# Altium PCB mosv1.0.PcbDoc
Units mil, origin at the board's own origin, x right, y up, seen from the top; angles counter-clockwise.
Board outline 6000 x 4000 mil, 2 copper layers (Top Layer, Bottom Layer); 59 components, 38 nets, 166 pads, 305 vias.
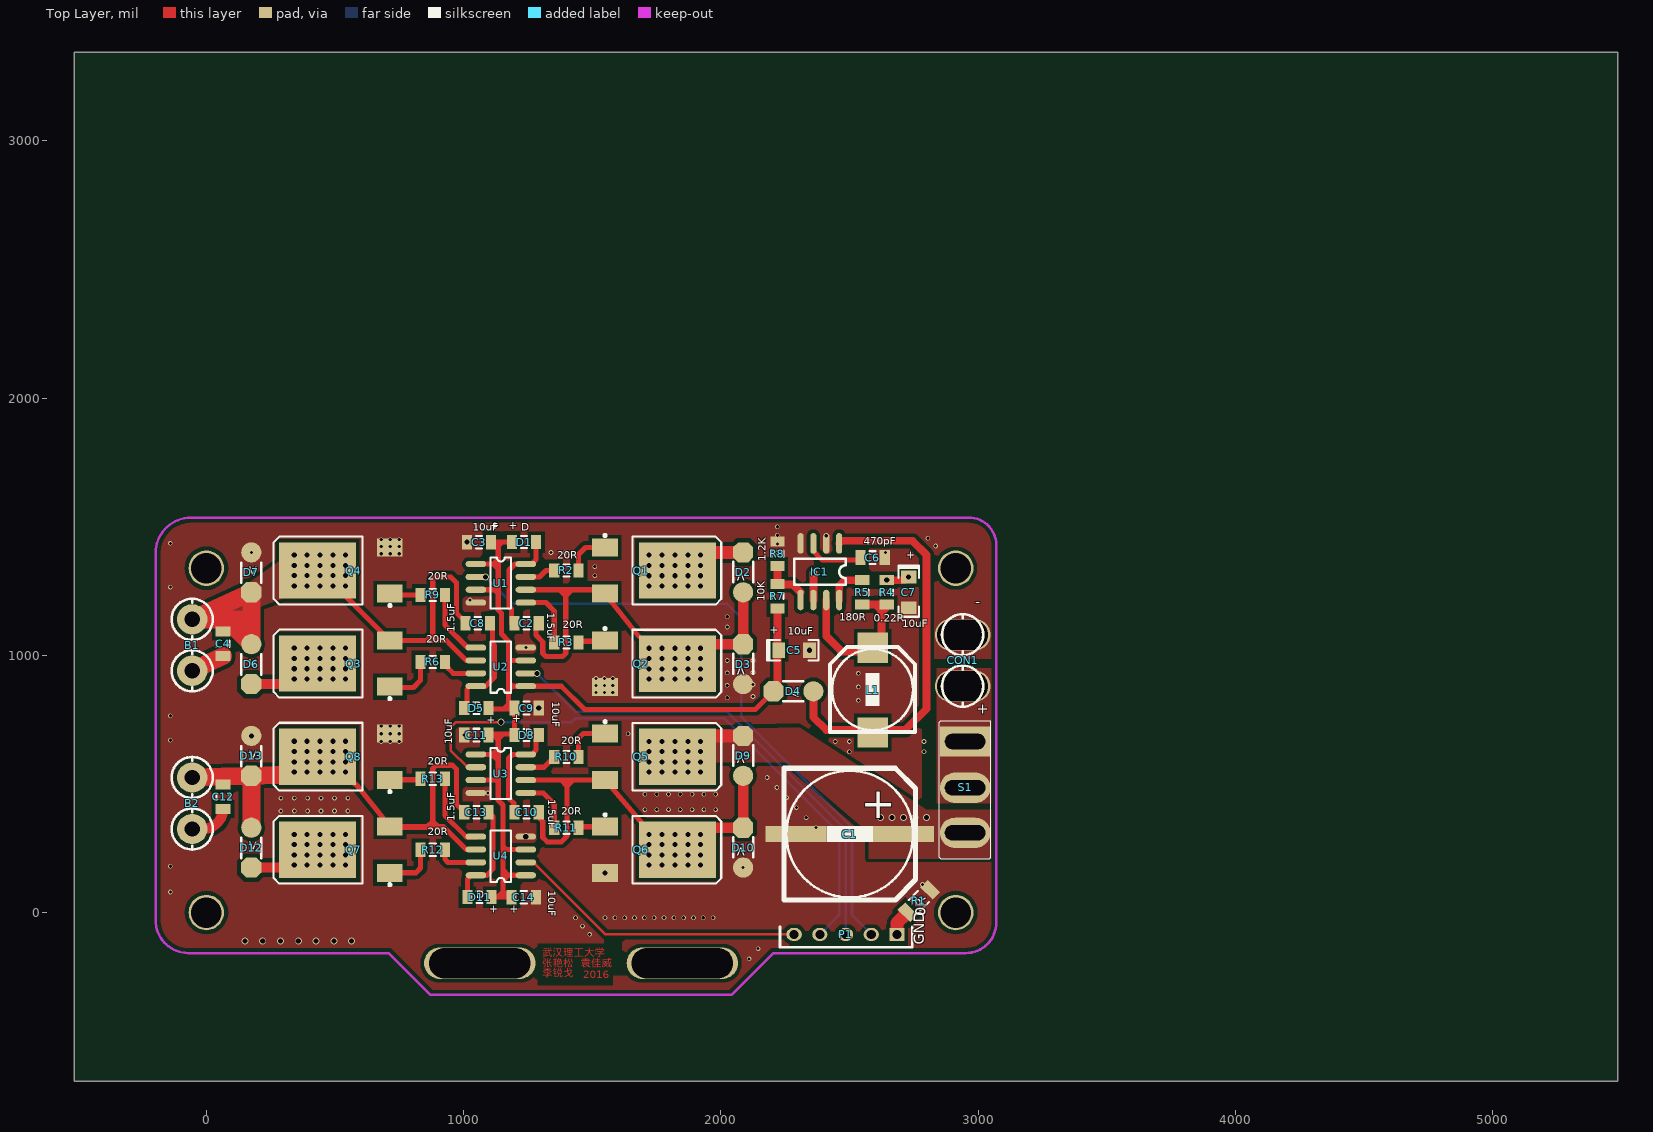
[diagram p0: Top Layer view]
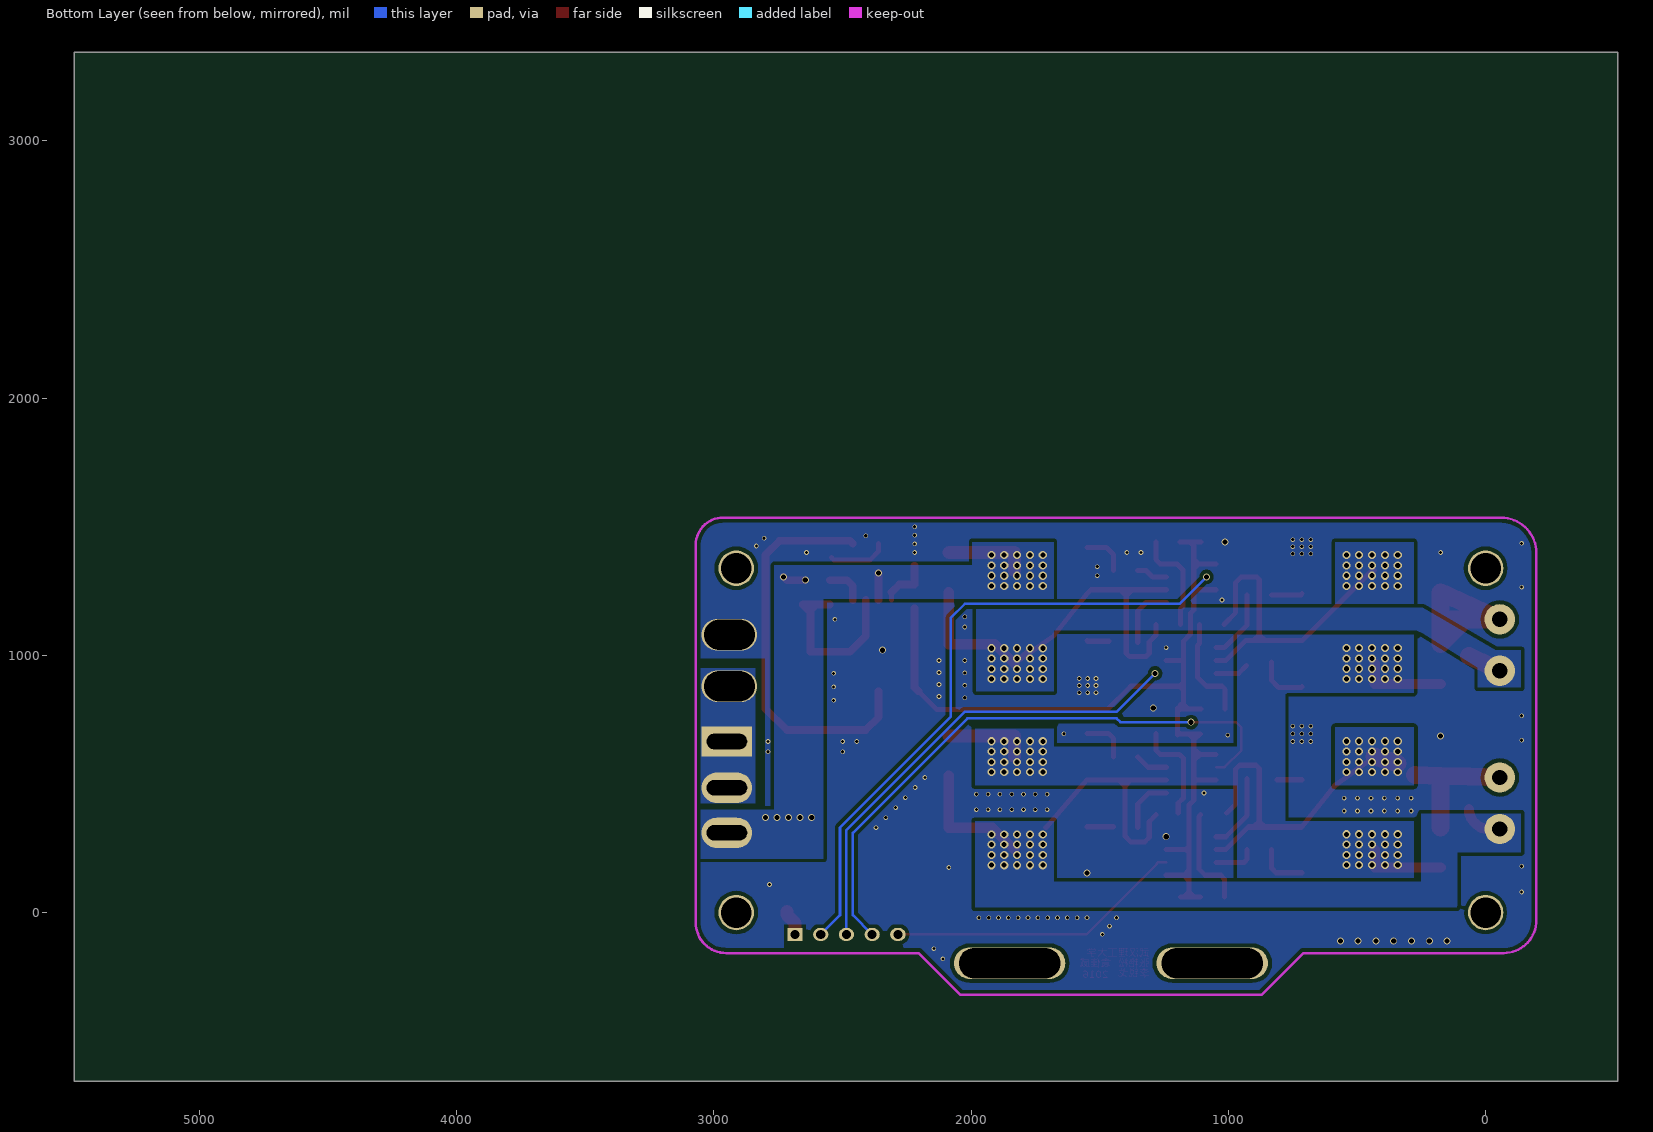
[diagram p1: Bottom Layer view, seen from below]

## Layer stack, top to bottom
Top Layer: signal copper 1.4
Dielectric: dielectric 12.6, FR-4, Dk 4.8
Bottom Layer: signal copper 1.4

## Board outline
-513.31,-655.71 5486.69,-655.71 5486.69,3344.29 -513.31,3344.29

## Design rules (kind name [scope] priority, off if disabled: settings)
Clearance [All] p1: gap=15
PlaneConnect [All] p1: planeconnectstyle=Direct reliefexpansion=20 reliefentries=4 reliefconductorwidth=10 reliefairgap=10
PolygonConnect [All] p1: connectstyle=Direct reliefconductorwidth=10 reliefentries=4 polygonreliefangle="90 Angle" airgapwidth=10
RoutingVias [All] p1: holewidth=28 width=50 viastyle="Through Hole" minholewidth=28 minwidth=50 maxholewidth=28 maxwidth=50
SolderMaskExpansion [All] p1: expansion=4
Width [All] p1: maxlimit=70 minlimit=10 preferedwidth=40 minimp=50.000000 maximp=50.000000 favimp=50.000000
27 further rules are at their usual default settings.

## Components (designator, comment, footprint, x,y, rotation, side; value= is the part's Value field where it differs from the comment)
B1 "Motor" KF301-2P#1 -55,1040 r0 top
B2 "Motor" KF301-2P#1 -55,425 r0 top
C1 "Cap" SMD-EC-F12.5 2710,305 r180 top
C2 "Cap" C2012 1245,1125 r180 top
C3 "Cap Pol1" C2012 1060,1440 r180 top
C4 "Cap" C2012 65,1045 r90 top
C5 "Cap Pol1" 1206C 2285,1020 r180 top
C6 "Cap" C2012 2590,1380 r180 top
C7 "Cap Pol1" 1206C 2730,1245 r90 top
C8 "Cap" C2012 1055,1125 r0 top
C9 "Cap Pol1" C2012 1245,795 r0 top
C10 "Cap" C2012 1245,390 r180 top
C11 "Cap Pol1" C2012 1050,690 r180 top
C12 "Cap" C2012 65,450 r90 top
C13 "Cap" C2012 1050,390 r0 top
C14 "Cap Pol1" C2012 1234.02,60 r0 top
CON1 "PowerIn" KF301-2P#2 2940,980 r180 top
D1 "S4" R2012 1235,1440 r0 top
D2 "SS14" "hole-chip diode" 2126.69,1245 r90 top
D3 "SS14" "hole-chip diode" 2126.69,888.33 r90 top
D4 "SS14" "hole-chip diode" 2360,900 r180 top
D5 "S4" R2012 1050,795 r180 top
D6 "SS14" "hole-chip diode" 135,1043.33 r270 top
D7 "SS14" "hole-chip diode" 135,1400 r270 top
D8 "S4" R2012 1245,690 r0 top
D9 "SS14" "hole-chip diode" 2126.69,531.67 r90 top
D10 "SS14" "hole-chip diode" 2126.69,175 r90 top
D11 "S4" R2012 1061.97,60 r180 top
D12 "SS14" "hole-chip diode" 135,330 r270 top
D13 "SS14" "hole-chip diode" 135,686.67 r270 top
IC1 "MC34063" SO-8 2460,1435 r270 top
L1 "Inductor" SMD-EC-F8 2590,1005 r270 top
P1 "Header 5" 2.54XD_5 2485,-85 r180 top
Q1 "IR7843" LR7843 1691.69,1329.29 r180 top
Q2 "IR7843" LR7843 1691.69,967.56 r180 top
Q3 "IR7843" LR7843 571.69,967.76 r0 top
Q4 "IR7843" LR7843 571.69,1329.49 r0 top
Q5 "IR7843" LR7843 1691.69,605.83 r180 top
Q6 "IR7843" LR7843 1691.69,244.09 r180 top
Q7 "IR7843" LR7843 571.69,244.29 r0 top
Q8 "IR7843" LR7843 571.69,606.02 r0 top
R1 "Res2" 1206(2) 2770,45 r225 top
R2 "Res2" R2012 1400,1330 r0 top
R3 "Res2" R2012 1400,1050 r0 top
R4 "Res2" R2012 2645,1245 r270 top
R5 "Res2" R2012 2550,1245 r270 top
R6 "Res2" R2012 880,974.29 r180 top
R7 "Res2" R2012 2220,1230 r90 top
R8 "Res2" R2012 2220,1395 r270 top
R9 "Res2" R2012 880,1235 r180 top
R10 "Res2" R2012 1400,605 r0 top
R11 "Res2" R2012 1400,330 r0 top
R12 "Res2" R2012 880,244.29 r180 top
R13 "Res2" R2012 880,520 r180 top
S1 "SW-SPST" SW-125V6A(-) 2950,665 r270 top
U1 "IR2104S" IR2104 1145,1280 r0 top
U2 "IR2104S" IR2104 1145,955 r180 top
U3 "IR2104S" IR2104 1145,540 r0 top
U4 "IR2104S" IR2104 1145,220 r180 top

## Footprints (in the part's own frame and the unit in brackets; to place one, negate y for a bottom-side part, rotate by r counter-clockwise, add the part's x,y. Pads: shape width x height; smd on the part's side, far side on the other; paste and mask are expansions set on the pad)
2.54XD_5 [mm]
  rect 1.5x1.27 hole 0.9: 1(-5.08,0)
  oval 1.5x1.27 hole 0.9: 2(-2.54,0) 3(0,0) 4(2.54,0)
  oval 1.524x1.27 hole 0.9: 5(5.08,0)
  silkscreen extent -6.6,-0.76 6.48,1.27
1206(2) [mm]
  rect 1.05x1.75 smd: 1(-1.575,0) 2(1.575,0)
  silkscreen extent -0.65,-0.77 0.65,0.77, body extent -1.6,-0.8 1.6,0.8, height 1.6
1206C [mil]
  rect 50x60 smd: 1(60,0) 2(-60,0)
  silkscreen extent -95,-40 105,40
C2012 [mm] "Chip Capacitor, 2-Leads, Body 2.0x1.2mm, IPC Low Density"
  rect 1x1.45 smd: 1(-1.2,0) 2(1.2,0)
  silkscreen extent -0.3,-0.63 0.3,0.63, body extent -0.98,-0.6 1.02,0.6, height 0.5
"hole-chip diode" [mm]
  round 2 smd: 1(0,1.016)
  oct 2x2 smd: 2(3.937,1.016)
  silkscreen extent 1,0 3,2
IR2104 [mil]
  oval 80x23.62 smd: 1(-97,75) 2(-97,25) 3(-97,-25) 4(-97,-75) 5(97,-75) 6(97,-25) 7(97,25) 8(97,75)
  silkscreen extent -40,-98 40,100
KF301-2P#1 [mm]
  round 3 hole 1.5: 1(0,-2.54) 2(0,2.54)
  silkscreen extent -2.03,-4.57 2.03,4.57
KF301-2P#2 [mm]
  oval 5.5x3.1 hole 3 slot 5 at 0 deg: 1(0,-2.54) 2(0,2.54)
  silkscreen extent -2.03,-4.57 2.03,4.57
LR7843 [mm]
  rect 2.54x1.778 smd: 1(3.6,-2.28) 3(3.6,2.28)
  rect 7.6x5.55 smd: 2(-3.556,0)
  silkscreen extent -7.87,-3.58 3.72,3.35
R2012 [mm] "Chip Resistor, 2-Leads, Body 2.0x1.2mm, IPC Low Density"
  rect 1x1.4 smd: 1(-1.2,0) 2(1.2,0)
  silkscreen extent -0.3,-0.6 0.3,0.6, body extent -0.98,-0.6 1.02,0.6, height 0.5
SMD-EC-F8 [mm]
  rect 3x3 smd: 1(-0.635,0) 2(7.747,0)
  silkscreen extent -0.69,-4.22 7.71,4.2
SMD-EC-F12.5 [mm]
  rect 6x1.6 smd: 1(0,0) 2(10.625,0)
  silkscreen extent -1.2,-6.5 11.8,6.49
SO-8 [mil]
  oval 80x24 smd: 1(0,0) 2(0,-50) 3(0,-100) 4(0,-150) 5(220,-150) 6(220,-100) 7(220,-50) 8(220,0)
  silkscreen extent 60,-175 160,25
SW-125V6A(-) [mm]
  rect 3x5 hole 1.5 slot 4 at 90 deg: 0(0,0)
  oval 3x5 hole 1.5 slot 4 at 90 deg: 1(4.572,0) 2(9.017,0)
  silkscreen extent -2.03,-2.54 11.56,2.54

## Part data
B1 B2: library part "Motor Servo", "Servo Motor"
C1: library part CAP+
C2 C4 C6 C8 C10 C12 C13: "Capacitor"
C3 C5 C7 C9 C11 C14: "Polarized Capacitor (Radial)"
CON1: library part "Header 2", "Header, 2-Pin"
D1 D2 D3 D4 D5 D6 D7 D8 D9 D10 D11 D12 D13: library part "Diode 1N4007", "1 Amp General Purpose Rectifier"
P1: "Header, 5-Pin"
Q1 Q2 Q3 Q4 Q5 Q6 Q7 Q8: library part NMOS-2, "N-Channel Power MOSFET"
R1 R2 R3 R4 R5 R6 R7 R8 R9 R10 R11 R12 R13: "Resistor"
S1: "Single-Pole, Single-Throw Switch"
U1 U2 U3 U4: library part Component_1_1

## Free pads (board coordinates)
  round 137.8 hole 118.11: 0(0,0) 0(0,1338.58) 0(2913.39,0) 0(2913.39,1338.58)
  oval 433.07x122.05 hole 118.11 slot 393.7 at 0 deg: 0(1062.99,-196.85) 0(1850.39,-196.85)

## Via types
v1: diameter 31.5, hole 19.68, Top Layer to Bottom Layer, 160 vias
v2: diameter 18, hole 12, Top Layer to Bottom Layer, 121 vias
v3: diameter 27, hole 20, Top Layer to Bottom Layer, 24 vias

## Nets (pads, with @x,y where several pads share a name; then routed paths per layer and width w, separated by ;. In a path a pad name is that pad's centre, name@x,y a point inside that pad or via, vN(x,y) a via of type N, cw(c..) or ccw(c..) an arc to the next point about the centre after c; other vN are vias at no path point)
12V: C3.1 C5.1 C9.1 C11.1 C14.1 D1.1 D4.2 D5.1 D8.1 D11.1 R7.1 U1.1 U1.3 U2.1 U2.3 U3.1 U3.3 U4.1 U4.3 | length 4205.8
  Top Layer w20: U3.3 1125,515 ; U3.1 1110,615 ; U1.3 1120,1255 ; U1.1 1115,1355 ; D5.1@1107.24,790.98 1155.98,790.98 ; C3.1 1127.5,1440 ; C11.1@1108.23,694.02 1145,694.02 ; D11.1 1133.07,60 ; C11.1@1110.98,694.02 1132.5,672.5 1154.02,694.02 ; 1127.5,1355 1115,1355 ; 1135,1240 1120,1255 ; 1153.07,61.93 1153.07,80 ; 1162.99,145 1173.07,145 ; 1175,795 1175,810 ; 1175,980 U2.3 ; C14.1 C14.1@1173.07,60 ; C9.1@1186.77,790 C9.1@1186.77,790.98 ; C9.1@1186.77,808.23 C9.1@1186.77,790.98 ; D8.1@1187.76,695 1186.77,694.02 1154.02,694.02 ; D1.1 1150,1440 ; D8.1 C9.1 ; U4.1 1173.07,145 ; U4.3 1165,245 ; D4.2 2135,790 1470,790 1380,880 U2.1 1190,880 ; 1110,615 1135,590 ; 1110,615 1135,615 ; 1110,615 1135,635 ; 1115,1355 1135,1375 ; 1115,1355 1135,1335 ; 1120,1255 1135,1270 ; 1125,515 1135,525 ; 1125,515 1135,505 ; 1127.5,1440 1135,1432.5 1135,1425 ; 1127.5,1440 1150,1440 ; 1133.07,60 1153.07,80 ; 1133.07,60 C14.1@1173.07,60 ; 1135,505 1135,435.83 1153.07,417.76 1153.07,256.93 ; 1135,505 1135,525 ; 1135,525 1135,590 ; 1135,590 1135,615 ; 1135,615 1135,635 ; 1135,635 1135,684.02 1145,694.02 ; 1135,1270 1135,1335 ; 1135,1270 1135,1175.83 1147.24,1163.58 1147.24,1082.76 1175,1055 1175,895 ; 1135,1335 1135,1375 ; 1135,1375 1135,1425 ; 1135,1425 1150,1440 ; 1145,694.02 1154.02,694.02 ; 1153.07,80 C14.1@1173.07,60 ; 1153.07,80 1153.07,125 ; 1153.07,125 1173.07,145 ; 1153.07,125 1153.07,165 ; 1153.07,165 1173.07,145 ; 1153.07,165 1153.07,233.07 ; 1153.07,233.07 1165,245 ; 1153.07,233.07 1153.07,256.93 ; 1153.07,256.93 1165,245 ; 1155.98,790.98 1175,810 ; 1155.98,790.98 C9.1@1186.77,790.98 ; 1175,810 1175,865 ; 1175,865 1190,880 ; 1175,865 1175,880 ; 1175,880 1175,895 ; 1175,880 1190,880 ; 1175,895 1190,880
  Top Layer w30: D4.2 2220,875 R7.1
GND: C1.2 C3.2 C5.2 C6.1 C7.2 C9.2 C11.2 C14.2 CON1.1 D3.1 D7.1 D10.1 D13.1 IC1.2 IC1.4 Q2.3 Q4.3 Q6.3 Q8.3 R1.1 R8.1 U1.4 U2.4 U3.4 U4.4
  other v2: 2110,-180 2145,-140 1490,-85 1462.5,-52.5 1435,-20 1550,-20 1588.18,-20 1626.36,-20 1664.55,-20 1702.73,-20 1740.91,-20 1779.09,-20 1817.27,-20 1855.45,-20 1893.64,-20 1931.82,-20 1970,-20 -140,80 2783.85,108.85 2086.69,175 -140,180 2370,330 2332,369 290,395 342,395 394,395 446,395 498,395 550,395 1705,400 1750.83,400 1796.67,400 1842.5,400 1888.33,400 1934.17,400 1980,400 2294,408 290,445 342,445 394,445 446,445 498,445 550,445 2256,447 1705,460 1750.83,460 1796.67,460 1842.5,460 1888.33,460 1934.17,460 1980,460 1095,465 2218,486 2180,525 2500,625 2790,625 680,665 715,665 750,665 2445,665 2500,665 2790,665 -140,670 1002.76,690 680,695 715,695 750,695 1640,695 680,725 715,725 750,725 -140,765 2535,825 2025,835 2125,840 1515,855 1547.5,855 1580,855 2535,877.5 1515,882.5 1547.5,882.5 1580,882.5 2025,883.33 2125,886.67 1515,910 1547.5,910 1580,910 2535,930 2025,931.67 2125,933.33 2025,980 2125,980 1242,1030 2025,1110 2530,1140 2025,1150 1025,1215 -140,1265 1510,1310 1510,1345 680,1395 715,1395 750,1395 175,1400 1340,1400 1395,1400 2220,1400 2640,1400 680,1422.5 715,1422.5 750,1422.5 2835,1425 2220,1433.33 -140,1435 680,1450 715,1450 750,1450 2805,1455 2410,1465 2220,1466.67 2220,1500
  other v3: 150,-110 219.17,-110 288.33,-110 357.5,-110 426.67,-110 495.83,-110 565,-110 1549.96,154.33 1242,295 175,686.67 1292.24,795 2345,1020 1012.76,1440
NetB1_1: B1.1 C2.1 C4.1 D2.1 D3.2 Q1.3 Q2.2 U1.6 | length 1960.5
  Top Layer w20: U1.6 1372.44,1255 ; C2.1@1281.26,1120 1281.26,1078.74 1308.07,1051.93 1308.07,1006.93 1320,995 1385,995 1397.44,1007.44 1397.44,1230 ; 1425,1255 1422.44,1255 ; Q2.2@1770.65,1026.48 1816.52,982.2 Q2.2 1815.6,978.96 1782.3,1002.54 1763.44,1015.9 1730.14,1039.49 1680,1075 Q1.3 1534.49,1255 1422.44,1255 ; 1372.44,1255 1397.44,1230 ; 1372.44,1255 1397.44,1255 ; 1397.44,1230 1422.44,1255 ; 1397.44,1230 1397.44,1255 ; 1397.44,1255 1422.44,1255
  Top Layer w40: Q2.2 1907.47,1043.33 D3.2 D2.1
  Top Layer w70: B1.1 C4.1
  other v1: 1721.69,907.56 1771.69,907.56 1821.69,907.56 1871.69,907.56 1921.69,907.56 1721.69,947.56 1771.69,947.56 1821.69,947.56 1871.69,947.56 1921.69,947.56 1721.69,987.56 1771.69,987.56 1821.69,987.56 1871.69,987.56 1921.69,987.56 1721.69,1027.56 1771.69,1027.56 1821.69,1027.56 1871.69,1027.56 1921.69,1027.56
NetB1_2: B1.2 C4.2 C8.1 D6.1 D7.2 Q3.3 Q4.2 U2.6 | length 2232.1
  Top Layer w20: Q4.2 441.46,1329.49 Q3.3 857.52,1057.52 ; 905,1057.52 902.48,1057.52 ; C8.1@1017.76,1120 971.93,1165.83 971.93,1283.07 950,1305 890,1305 880,1295 880,1080 ; U2.6 1010,980 932.48,1057.52 902.48,1057.52 ; 857.52,1057.52 880,1080 ; 857.52,1057.52 880,1057.52 ; 880,1057.52 902.48,1057.52 ; 880,1057.52 880,1080 ; 880,1080 902.48,1057.52
  Top Layer w70: 175,1140 B1.2 D7.2 175,1140 ; 175,1140 95,1125 96.68,1123.28 D6.1 175,1140
  other v1: 341.69,1269.49 391.69,1269.49 441.69,1269.49 491.69,1269.49 541.69,1269.49 341.69,1309.49 391.69,1309.49 441.69,1309.49 491.69,1309.49 541.69,1309.49 341.69,1349.49 391.69,1349.49 441.69,1349.49 491.69,1349.49 541.69,1349.49 341.69,1389.49 391.69,1389.49 441.69,1389.49 491.69,1389.49 541.69,1389.49
NetB2_1: B2.1 C10.1 C12.1 D9.1 D10.2 Q5.3 Q6.2 U3.6 | length 1700
  Top Layer w20: U3.6 1380,515 ; C10.1@1281.26,380 1308.07,353.19 1308.07,292.09 1325.16,275 1380.36,275 1402.56,297.2 1402.56,492.56 ; Q5.3@1548.9,515 1425,515 ; Q5.3@1550.03,515.98 Q6.2@1710,330 ; 1380,515 1402.44,492.56 1402.56,492.56 ; 1380,515 1402.56,515 ; 1402.56,492.56 1425,515 ; 1402.56,492.56 1402.56,515 ; 1402.56,515 1425,515
  Top Layer w40: B2.1 -12.76,325 ccw(c-12.76,402.76) C12.1 ; Q6.2 1917.6,330 D10.2 D9.1
  other v1: 1721.69,184.09 1771.69,184.09 1821.69,184.09 1871.69,184.09 1921.69,184.09 1721.69,224.09 1771.69,224.09 1821.69,224.09 1871.69,224.09 1921.69,224.09 1721.69,264.09 1771.69,264.09 1821.69,264.09 1871.69,264.09 1921.69,264.09 1721.69,304.09 1771.69,304.09 1821.69,304.09 1871.69,304.09 1921.69,304.09
NetB2_2: B2.2 C12.2 C13.1 D12.1 D13.2 Q7.3 Q8.2 U4.6 | length 2202.3
  Top Layer w20: Q8.2 447.75,594.39 480.55,570.64 499.55,556.88 532.35,533.13 585,495 Q7.3 ; 925,330 905,330 ; C13.1@1006.87,386.87 971.93,421.81 971.93,557.91 957.28,572.56 892.44,572.56 892.5,572.5 880,560 880,355 ; U4.6 1010,245 920.94,334.06 900.94,334.06 ; Q7.3 717.48,330 860,330 ; Q7.3 860,334.06 ; 860,330 860,334.06 ; 860,330 880,330 ; 860,334.06 860,335 880,355 ; 860,334.06 880,334.06 ; 880,330 880,334.06 ; 880,330 905,330 ; 880,334.06 900.94,334.06 ; 880,334.06 880,355 ; 880,355 900.94,334.06 ; 900.94,334.06 905,330
  Top Layer w70: B2.2 64.1,528.45 D13.2 ; D12.1 D13.2 ; 275,535 D13.2 ; Q8.2 400.13,596.88 389.44,593.79 382.34,591.73 378.75,590.69 371.85,588.69 Q8.2@354.01,583.52 ; Q8.2@354.01,583.52 343.32,580.42 Q8.2@354.01,583.52
  other v1: 341.69,546.02 391.69,546.02 441.69,546.02 491.69,546.02 541.69,546.02 341.69,586.02 391.69,586.02 441.69,586.02 491.69,586.02 541.69,586.02 341.69,626.02 391.69,626.02 441.69,626.02 491.69,626.02 541.69,626.02 341.69,666.02 391.69,666.02 441.69,666.02 491.69,666.02 541.69,666.02
NetC2_2: C2.2 D1.2 U1.8 | length 405.7
  Top Layer w20: C2.2@1186.77,1120 1186.77,1179.98 1177,1189.75 1177,1332 1200,1355 U1.8 1265,1355 1282.24,1372.24 D1.2
NetC6_2: C6.2 IC1.3 | length 231.6
  Top Layer w20: IC1.3 2360,1404.67 2394.67,1370 2532.76,1370 C6.2
NetC8_2: C8.2 D5.2 U2.8 | length 411.8
  Top Layer w20: D5.2@1012.76,790.98 1012.76,867.76 1025,880 U2.8 1085,880 1120,915 1120,1038.25 1112.24,1046 C8.2@1112.24,1120
NetC10_2: C10.2 D8.2 U3.8 | length 403.4
  Top Layer w20: C10.2@1195,388.23 1195,425.33 1175,445.33 1175,600 1190,615 U3.8 1265,615 1282.24,632.24 D8.2@1282.24,695
NetC13_2: C13.2 D11.2 U4.8 | length 399.5
  Top Layer w20: D11.2 1014.72,129.72 1030,145 U4.8 1090,145 1115,170 1115,373.23 C13.2@1108.23,380
NetD4_1: D4.1 IC1.1 L1.2 | length 1564.6
  Top Layer w20: D4.1 D4.1@2363.74,856.26
  Top Layer w30: D4.1 2360,760 2410,710 2717.48,710 2800,792.52 2800,1390 2745,1445 2470,1445 IC1.1
NetIC1_5: IC1.5 R7.2 R8.2 | length 205.2
  Top Layer w20: R7.2@2220,1275 R7.2 ; IC1.5 IC1.5@2310,1245
  Top Layer w30: R7.2@2220,1275 2280,1275 IC1.5@2310,1245 ; R7.2 R8.2
NetIC1_7: IC1.7 L1.1 R4.2 R5.2 | length 744
  Top Layer w30: IC1.7 2410,1075 2471.26,1013.74 2625,1013.74 R4.2@2625,1197.76 ; R5.2 2602.24,1197.76 ; 2602.24,1197.76 2628.62,1171.38 2655,1197.76 R4.2@2625,1197.76 ; 2602.24,1197.76 R4.2@2625,1197.76
NetIC1_8: IC1.8 R5.1 | length 154.2
  Top Layer w30: IC1.8 2460,1270 2482.24,1292.24 R5.1
NetP1_1: P1.1 R1.2 | length 102.4
  Top Layer w50: P1.1 2685,-40 2716.69,-8.31 R1.2@2716.69,4.29
NetQ1_1: Q1.1 R2.2 | length 176.1
  Top Layer w20: R2.2 1447.24,1392.24 1474.06,1419.06 Q1.1
NetQ2_1: Q2.1 R3.2 | length 85.9
  Top Layer w20: R3.2@1465,1055 1547.64,1055 Q2.1
NetQ3_1: Q3.1 R6.2 | length 203.6
  Top Layer w20: Q3.1 716.42,875 805,875 832.76,902.76 R6.2
NetQ4_1: Q4.1 R9.2 | length 121.3
  Top Layer w20: Q4.1 718.15,1235 R9.2
NetQ5_1: Q5.1 R10.2 | length 182.6
  Top Layer w20: R10.2 1447.24,677.24 1465.59,695.59 Q5.1
NetQ6_1: Q6.1 R11.2 | length 102.7
  Top Layer w20: R11.2@1447.24,333.86 Q6.1
NetQ7_1: Q7.1 R12.2 | length 198.4
  Top Layer w20: Q7.1 814.53,154.53 832.76,172.76 R12.2
NetQ8_1: Q8.1 R13.2 | length 97.8
  Top Layer w20: Q8.1 811.26,516.26
NetR2_1: R2.1 U1.7 | length 121.1
  Top Layer w20: U1.7 1295,1305 1320,1330 R2.1
NetR3_1: R3.1 U1.5 | length 246.6
  Top Layer w20: U1.5 1320,1205 1352.76,1172.24 R3.1
NetR6_1: R6.1 U2.7 | length 130.4
  Top Layer w20: R6.1@930,960 960,930 U2.7
NetR9_1: R9.1 U2.5 | length 274.3
  Top Layer w20: R9.1 927.24,1117.76 1015,1030 U2.5
NetR10_1: R10.1 U3.7 | length 127.3
  Top Layer w20: U3.7 1312.76,565 R10.1
NetR11_1: R11.1 U3.5 | length 220.7
  Top Layer w20: U3.5 1310,465 1352.76,422.24 R11.1
NetR12_1: R12.1 U4.7 | length 162.6
  Top Layer w20: R12.1 927.24,207.76 940,195 U4.7
NetR13_1: R13.1 U4.5 | length 297.3
  Top Layer w20: R13.1 927.24,377.76 1010,295 U4.5
PWM1: P1.2 U1.2 | length 2511.6
  Bottom Layer w10: v3(1085,1305) 1190,1200 2025,1200 2080,1145 2080,760.71 ; 2087.86,752.86 2080,760.71 ; P1.2 2510,-10 2510,330.71 2080,760.71
PWM2: P1.3 U2.2 | length 1857.9
  Bottom Layer w10: v3(1285,930) 1435,780 2025.36,780 2485,320.36 P1.3
PWM3: P1.4 U3.2 | length 2349.8
  Top Layer w10: U3.2 1015,565 950,630 950,720 970,740 v3(1145,740)
  Bottom Layer w10: v3(1145,740) 1420,740 1435,755 2015,755 2460,310 2460,-10 P1.4
PWM4: P1.5 U4.2 | length 1160.4
  Top Layer w10: U4.2 1275,195 1278.07,191.93 1278.07,189.5 1552.57,-85 P1.5
VBAT: CON1.2 S1.0 S1.1
VCC: C1.1 C7.1 D2.2 D6.2 D9.2 D12.2 IC1.6 Q1.2 Q3.2 Q5.2 Q7.2 R4.1 S1.2 | length 1518.9
  Top Layer w30: IC1.6 v3(2360,1320) ; v3(2645,1292.24) 2717.24,1292.24 v3(2730,1305)
  Top Layer w40: D12.2 431.69,175 Q7.2 ; D6.2 431.69,888.33 Q3.2
  Top Layer w50: Q5.2 1831.69,686.67 D9.2 ; Q1.2 1831.69,1400 D2.2
  other v1: 341.69,184.29 391.69,184.29 441.69,184.29 491.69,184.29 541.69,184.29 341.69,224.29 391.69,224.29 441.69,224.29 491.69,224.29 541.69,224.29 341.69,264.29 391.69,264.29 441.69,264.29 491.69,264.29 541.69,264.29 341.69,304.29 391.69,304.29 441.69,304.29 491.69,304.29 541.69,304.29 1721.69,545.83 1771.69,545.83 1821.69,545.83 1871.69,545.83 1921.69,545.83 1721.69,585.83 1771.69,585.83 1821.69,585.83 1871.69,585.83 1921.69,585.83 1721.69,625.83 1771.69,625.83 1821.69,625.83 1871.69,625.83 1921.69,625.83 1721.69,665.83 1771.69,665.83 1821.69,665.83 1871.69,665.83 1921.69,665.83 341.69,907.76 391.69,907.76 441.69,907.76 491.69,907.76 541.69,907.76 341.69,947.76 391.69,947.76 441.69,947.76 491.69,947.76 541.69,947.76 341.69,987.76 391.69,987.76 441.69,987.76 491.69,987.76 541.69,987.76 341.69,1027.76 391.69,1027.76 441.69,1027.76 491.69,1027.76 541.69,1027.76 1721.69,1269.29 1771.69,1269.29 1821.69,1269.29 1871.69,1269.29 1921.69,1269.29 1721.69,1309.29 1771.69,1309.29 1821.69,1309.29 1871.69,1309.29 1921.69,1309.29 1721.69,1349.29 1771.69,1349.29 1821.69,1349.29 1871.69,1349.29 1921.69,1349.29 1721.69,1389.29 1771.69,1389.29 1821.69,1389.29 1871.69,1389.29 1921.69,1389.29
  other v3: 2620,370 2665,370 2710,370 2755,370 2800,370

## Polygon pours and split planes (outlines as drawn)
GND on Top Layer "Keep-Out Layer-No Net" (solid, remove dead copper, pour order 81): 3069.99,987.66 3069.99,1535 2903.07,1535 -195,1535 -195,1151.03 -195,-355 1087.21,-355 3070.87,-355 3070.87,206.57 2781.68,206.57 2781.68,987.66
VCC on Top Layer "Keep-Out Layer-No Net" (solid, pour order 43): 2215,620 2575,310 2800,400 2305,720
VCC on Top Layer "Keep-Out Layer-No Net" (solid, pour order 39): 1980,713.25 1980,585 2305,585 2305,720
VBAT on Top Layer "Keep-Out Layer-No Net" (solid, remove dead copper, pour order 15): 2840,950 3070.87,950 3070.87,425 2850,425 2840,425 2840,950
VCC on Top Layer "Keep-Out Layer-No Net" (solid, remove dead copper, pour order 17): 3070.87,400 2575,400 2575,210 3070,210
NetB1_2 on Top Layer "Keep-Out Layer-No Net" (solid, remove dead copper, pour order 22): 85,1145 350,1240 330,1400 50,1200
VCC on Bottom Layer "Keep-Out Layer-No Net" (solid, remove dead copper, pour order 93): 1970,1350 2765,1350 2765,390 2765,365 2575,365 2575,1220 1965,1220
VCC on Bottom Layer "Keep-Out Layer-No Net" (solid, remove dead copper, pour order 91): 1755,495 875,495 875,645 1725,645
VCC on Bottom Layer "Keep-Out Layer-No Net" (solid, remove dead copper, pour order 89): 570,1080 965,1080 965,585 965,135 555,135 540,135 540,355 585,355 780,355 780,820 780,850 545,850
GND on Bottom Layer "Keep-Out Layer-No Net" (solid, remove dead copper, pour order 87): 3070.87,988.74 3070.87,1535.43 2517.81,1535.43 -200,1535.43 -200,758.82 -200,-355 992.99,-355 3070.87,-355 3070.87,150.82 3070.87,212.13 2831.89,212.13 2801.5,212.13 2801.5,564.67 2801.5,988.74 2887.62,988.74
GND on Bottom Layer "Keep-Out Layer-No Net" (solid, pour order 75): 3070,210 3070,-157.48 2204.72,-157.48 2575,-157.48 2575,210
NetB2_1 on Bottom Layer "Keep-Out Layer-No Net" (solid, pour order 67): 125,385 250,385 250,24.93 250,20 110,20 110,385
NetB2_1 on Bottom Layer "Keep-Out Layer-No Net" (solid, pour order 65): 1680,200 1680,120 245,120 200,120 200,30 200,20 1900,20 1985,20 1985,200
NetB2_1 on Bottom Layer "Keep-Out Layer-No Net" (solid, pour order 63): -157.48,385 125,385 125,245 125,235 -157.48,235
NetB1_1 on Bottom Layer "Keep-Out Layer-No Net" (solid, pour order 59): 245,1184.71 -100,985 -55,900 245,1085.85 365,1140
NetB1_1 on Bottom Layer "Keep-Out Layer-No Net" (solid, pour order 55): 245,1185 1980,1185 1980,1092.12 1980,1070 1680,1070 1680,1096.54 245,1096.54
NetB2_1 on Bottom Layer "Keep-Out Layer-No Net" (solid, pour order 53): 1815,355 1985,355 1985,270 1985,135 1790,135 1680,135 1680,285 1680,355 1755,355
NetB1_1 on Bottom Layer "Keep-Out Layer-No Net" (solid, pour order 51): 1785,1080 1980,1080 1980,935 1980,860 1785,860 1680,860 1680,1030 1680,1080 1730,1080
NetB2_2 on Bottom Layer "Keep-Out Layer-No Net" (solid, pour order 49): 380,720 585,720 585,585 585,495 385,495 280,495 280,650 280,720 345,720
NetB1_2 on Bottom Layer "Keep-Out Layer-No Net" (solid, pour order 47): 280,1440 585,1440 585,1200 420,1200 280,1200 280,1390
NetB1_1 on Bottom Layer "Keep-Out Layer-No Net" (solid, pour order 45): -157.48,875 30,875 30,1010 30,1020 -157.48,1020
VCC on Bottom Layer "Keep-Out Layer-No Net" (solid, pour order 31): 1680,1440 1995,1440 1995,1220 1680,1220
VBAT on Bottom Layer "Keep-Out Layer-No Net" (solid, remove dead copper, pour order 16): 2840,950 3070.87,950 3070.87,425 2840,425
VCC on Bottom Layer "Keep-Out Layer-No Net" (solid, remove dead copper, pour order 18): 3070,210 2575,210 2575,400 3070,400
VCC on Bottom Layer "Keep-Out Layer-No Net" (solid, remove dead copper, pour order 23): 280,355 585,355 585,205 585,135 280,135
VCC on Bottom Layer "Keep-Out Layer-No Net" (solid, remove dead copper, pour order 24): 1680,715 1680,495 1960,495 1985,495 1985,625 1985,715 1955,715
VCC on Bottom Layer "Keep-Out Layer-No Net" (solid, remove dead copper, pour order 26): 280,1080 280,855 485,855 580,855 580,965 580,1080 480,1080

## Keep-outs
Keep-Out Layer:
  lines w9.65: -196.85,-30 ccw(c-69.85,-30.48) -70.32,-157.48 ; -196.85,1397.4 cw(c-59.64,1398.23) -60.47,1535.43 ; 2963.49,1535.43 cw(c2964.46,1429.03) 3070.87,1430
  lines w10: -196.85,-30 -196.85,1397.4 ; -70.32,-157.48 708.66,-157.48 871.18,-320 2042.2,-320 2204.72,-157.48 2952.76,-157.48 ccw(c2952.76,-39.37) 3070.87,-39.37 3070.87,1430 ; -60.47,1535.43 2204.72,1535.43 2963.49,1535.43

## Other copper
Top Layer:
  text "武汉理工大学" at 1305,-180 h50
  text "张艳松" at 1305,-220 h50
  text "袁佳威" at 1455,-220 h50
  text "李锐戈" at 1305,-260 h50
  text "2016" at 1465,-265 h50

## Silkscreen, mask and mechanical layers (free items; w line width, h text height)
Top Overlay:
  text "+" at 1105,1480 h50
  text "+" at 1175,1480 h50
  text "10uF" at 1035,1475 h50
  text "D" at 1225,1475 h50
  text "470pF" at 2555,1420 h50
  text "20R" at 1365,1365 h50
  text "1.2K" at 2185,1365 h50 r90
  text "+" at 2720,1365 h50
  text "v" at 2095,1335 h70 r180
  text "v" at 165,1300 h70
  text "20R" at 860,1285 h50
  text "10K" at 2180,1210 h50 r90
  text "-" at 2990,1175 h70
  text "1.5uF" at 1315,1165 h50 r270
  text "180R" at 2460,1125 h50
  text "0.22R" at 2595,1120 h50
  text "10uF" at 2705,1100 h50
  text "20R" at 1385,1095 h50
  text "1.5uF" at 975,1090 h50 r90
  text "+" at 2190,1075 h50
  text "10uF" at 2260,1070 h50
  text "20R" at 855,1040 h50
  text "v" at 2095,970 h70 r180
  text "v" at 165,940 h70
  text "V" at 2265,865 h50 r270
  text "10uF" at 1335,820 h50 r270
  text "D" at 1040,780 h50
  text "+" at 2995,760 h70
  text "+" at 1190,730 h50
  text "+" at 1090,725 h50
  text "D" at 1240,675 h50
  text "10uF" at 965,655 h50 r90
  text "20R" at 1380,645 h50
  text "v" at 2095,625 h70 r180
  text "v" at 165,585 h70
  text "20R" at 860,565 h50
  text "1.5uF" at 1320,440 h50 r270
  text "20R" at 1380,370 h50
  text "1.5uF" at 975,355 h50 r90
  text "20R" at 860,290 h50
  text "v" at 2095,265 h70 r180
  text "v" at 165,230 h70
  text "10uF" at 1320,85 h50 r270
  text "D" at 1050,45 h50
  text "+" at 1100,-10 h50
  text "+" at 1180,-10 h50
  text "0R" at 2810,-15 h70 r90
  text "GND" at 2805,-125 h70 r90
Mechanical 15:
  lines w10: 0,0 2913.39,0

## Text inside footprints (layer, text, board x,y; h text height)
C1: Top Overlay "+" at 2680.49,469.11 h118.11 r180